# EAGLE board picoclick_c3t (EAGLE 9.6.2)
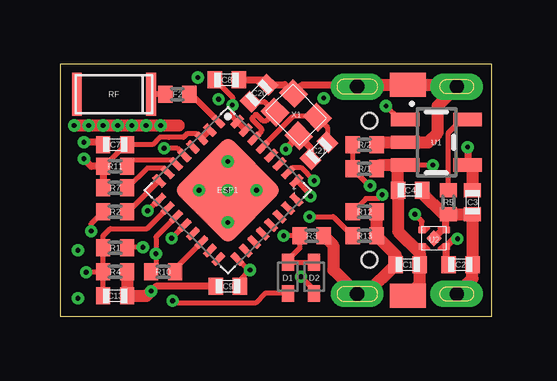
[diagram p0: board, top side]
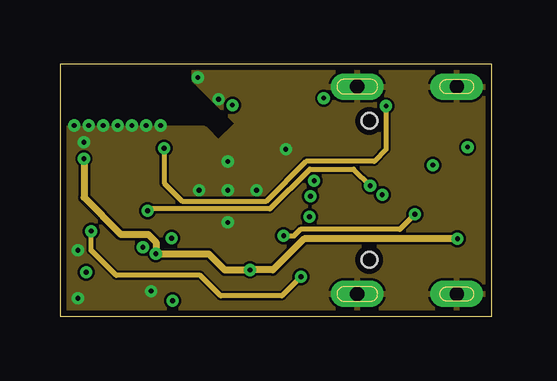
[diagram p1: board, inner layer Route2]
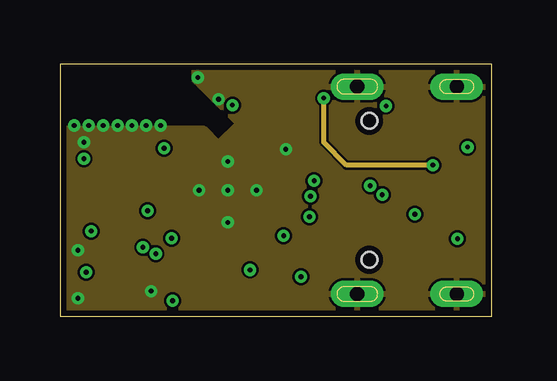
[diagram p2: board, inner layer Route15]
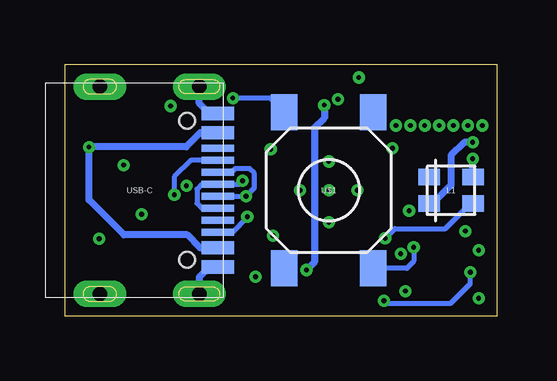
[diagram p3: board, bottom side, seen from below]

Size 18 x 10.5 mm. Coordinates in mm from the lower left corner, seen from the top.
Outline: 0,10.5 0,0 18,0 18,10.5 0,10.5
Copper layers (1+2*15+16): Top 0.035mm / dielectric 0.2mm / Route2 0.0175mm / dielectric 0.265mm / Route15 0.0175mm / dielectric 0.2mm / Bottom 0.035mm
Design rules "2020.08.24_4layers_eagle *": minimum track width 6mil, minimum drill 0.2mm, track to track 0.1mm, track to pad 0.1mm, pad to pad 0.1mm, via to via 0.1mm, smd to smd 0.1mm, copper to edge 10mil, drill to drill 6mil, minimum pad ring 10mil, minimum via ring 6mil, stop-mask expansion 0mil, vias tented up to drill 0.5mm, thermal gap 4mil

## Footprints (pad centres in the part's own frame; a part is rotated, then mirrored left to right if it is on the bottom)
SOLDERPAD_1.5X1.0 = smd 1 x 1.5: 1 0,0
C0402_S = smd 0.6 x 0.7: P$1 -0.5,0; P$2 0.5,0
SOD523 = smd 0.7 x 0.5: A 0.7,0; C -0.6,0
QFN32 = smd 0.6 x 0.275: 1 -2.3,1.75; 2 -2.3,1.25; 3 -2.3,0.75; 4 -2.3,0.25; 5 -2.3,-0.25; 6 -2.3,-0.75; 7 -2.3,-1.25; 8 -2.3,-1.75; 17 2.3,-1.75; 18 2.3,-1.25; 19 2.3,-0.75; 20 2.3,-0.25; 21 2.3,0.25; 22 2.3,0.75; 23 2.3,1.25; 24 2.3,1.75 | smd 0.275 x 0.6: 9 -1.75,-2.3; 10 -1.25,-2.3; 11 -0.75,-2.3; 12 -0.25,-2.3; 13 0.25,-2.3; 14 0.75,-2.3; 15 1.25,-2.3; 16 1.75,-2.3; 25 1.75,2.3; 26 1.25,2.3; 27 0.75,2.3; 28 0.25,2.3; 29 -0.25,2.3; 30 -0.75,2.3; 31 -1.25,2.3; 32 -1.75,2.3 | smd 3.2 x 3.2: EXP 0,0
R0402 = smd 0.6 x 0.7: 1 -0.5,0; 2 0.5,0
WS2812_2020 = smd 0.9 x 0.7: DI -0.915,0.55; DO 0.915,-0.55; GND 0.915,0.55; VDD -0.915,-0.55
ANT3216LL00R2400A = smd 1.8 x 0.4: P1 0,1.55; P2 0,-1.55
SOT23-5 = smd 0.55 x 1.2: 1 -0.95,-1.3; 2 0,-1.3; 3 0.95,-1.3; 4 0.95,1.3; 5 -0.95,1.3
TDFN4 = smd 0.48 x 0.48 rotated 45: EXP 0,0 | smd 0.25 x 0.3: P1 -0.35,-0.5; P2 0.35,-0.5; P3 0.35,0.5; P4 -0.35,0.5
BUTTON_ST-1187-3 = smd 1.5 x 1.1: P1 -3.25,1.85; P2 3.25,1.85; P3 -3.25,-1.85; P4 3.25,-1.85
USBC_C393939 = smd 0.55 x 1.35: A1B12 -3.2,0.775; A4B9 -2.4,0.775; B1A12 3.2,0.775; B4A9 2.4,0.775 | smd 0.275 x 1.35: A5 -1.25,0.775; A6 -0.25,0.775; A7 0.25,0.775; B5 1.75,0.775; B6 0.75,0.775; B7 -0.75,0.775; B8 1.25,0.775 | smd 0.3 x 1.35: A8 -1.75,0.775 | drill 0.6 pad 1 long: S1 -4.32,0; S2 4.32,0; S3 -4.32,-4.15; S4 4.32,-4.15 | hole 0.65: 2.89,-0.5; -2.89,-0.5
XTYL_2016 = smd 0.9 x 0.8: P1 -0.7,-0.55; P2 0.7,-0.55; P3 0.7,0.55; P4 -0.7,0.55

## Placement (x,y rotation side)
BAT+  TP/SP-1.5X1.0  [SOLDERPAD_1.5X1.0]  14.5,0.85 90 top
BAT-  TP/SP-1.5X1.0  [SOLDERPAD_1.5X1.0]  14.5,9.65 90 top
C1  1µ  [C0402_S]  14.5,2.15 0 top
C2  1µ  [C0402_S]  16.7,2.15 180 top
C3  1µ  [C0402_S]  17.2,4.75 90 top
C4  1µ  [C0402_S]  14.6,5.25 180 top
C7  10µ  [C0402_S]  2.3,7.15 0 top
C8  0,1µ  [C0402_S]  6.95,9.85 180 top
C9  0,1µ  [C0402_S]  7,1.25 0 top
C13  1µ  [C0402_S]  2.3,0.85 180 top
C20  10p  [C0402_S]  8.3,9.3 225 top
C21  10p  [C0402_S]  10.8,6.9 45 top
D1  4148  [SOD523]  9.5,1.65 270 top
D2  4148  [SOD523]  10.6,1.65 270 top
ESP1  ESP32_C3_QFN32  [QFN32]  7,5.25 315 top
F2  0  [R0402]  4.9,9.25 180 top
L1  WS2812_2020  [WS2812_2020]  1.9,5.25 180 bottom
R1  1k  [R0402]  2.3,2.85 0 top
R2  1k  [R0402]  2.3,4.35 0 top
R3  1M  [R0402]  10.5,3.35 180 top
R4  10k  [R0402]  2.3,1.85 180 top
R5  47.5k  [R0402]  16.2,4.75 270 top
R7  10k  [R0402]  2.3,5.35 0 top
R10  10k  [R0402]  4.3,1.85 0 top
R11  10k  [R0402]  2.3,6.25 0 top
R12  5.1k  [R0402]  12.7,4.35 0 top
R13  5.1k  [R0402]  12.7,3.35 0 top
R/1  1M  [R0402]  12.7,6.15 180 top
R/2  250k  [R0402]  12.7,7.15 0 top
RF  ANT3216LL00R2400A  [ANT3216LL00R2400A]  2.25,9.25 270 top
U1  BRCL4054BME  [SOT23-5]  15.7,7.25 270 top
U2  MIC5504  [TDFN4]  15.6,3.25 90 top
U$1  BUTTON_ST-1187-3  [BUTTON_ST-1187-3]  7,5.25 90 bottom
USB-C  USB_C_C393939  [USBC_C393939]  12.4,5.25 270 bottom
X1  XTAL_2016  [XTYL_2016]  9.85,8.4 315 top

## Library data of the parts
BAT+ BAT- = iml_elc
C1-C4 C7-C9 C13 C20 C21 ESP1 F2 L1 R1-R5 R7 R10-R13 R/1 R/2 RF U1 U2 U$1 USB-C X1 = moekoe
D1 D2 = diode

## Nets
+3V3: C2.P$2 C7.P$2 C8.P$2 C9.P$2 ESP1.2 ESP1.3 ESP1.11 ESP1.17 ESP1.31 ESP1.32 L1.VDD R7.1 R10.1 R11.1 U2.P1
+VBAT: BAT+.1 C1.P$2 C4.P$2 R/1.1 U1.3 U2.P4 U$1.P2
ADC: ESP1.9 R/1.2 R/2.1
BUTTON: C13.P$2 D1.A ESP1.10 R1.1 R4.2
DIN: ESP1.12 L1.DI
EN: ESP1.7 R7.2
EN_LDO: D1.C D2.C R3.2 U2.P3
GND: BAT-.1 C1.P$1 C2.P$1 C3.P$1 C4.P$1 C7.P$1 C8.P$1 C9.P$1 C13.P$1 C20.P$1 C21.P$1 ESP1.EXP L1.GND R3.1 R4.1 R5.2 R12.2 R13.2 R/2.2 U1.2 U2.EXP U2.P2 USB-C.A1B12 USB-C.B1A12 USB-C.S1 USB-C.S2 USB-C.S3 USB-C.S4 X1.P2 X1.P4
GPIO2: ESP1.6 R11.2
GPIO8: ESP1.14 R10.2
GPIO9: ESP1.15
GPIO10: ESP1.16
GPIO18: ESP1.25 USB-C.A7 USB-C.B7
GPIO19: ESP1.26 USB-C.A6 USB-C.B6
LATCH: ESP1.8 R2.2
N$1: R1.2 U$1.P3
N$4: ESP1.1 F2.1
N$6: F2.2 RF.P1
N$16: D2.A R2.1
N$18: R13.1 USB-C.B5
N$23: R5.1 U1.5
N$25: R12.1 USB-C.A5
N$26: C20.P$2 ESP1.30 X1.P1
N$27: C21.P$2 ESP1.29 X1.P3
RX: ESP1.27
STAT_MCP: ESP1.5 U1.1
TX: ESP1.28
VPP: C3.P$2 U1.4 USB-C.A4B9 USB-C.B4A9

## Tracks (layer width: path | path; a pad name or v marks a point on that pad's centre or on a via)
+3V3  (via drill 0.2)
  Top 0.2: R10.1 4,2.05 v4,2.6 4,3.31 ESP1.11 | C9.P$2 7.5,1.5 v7.93,1.93 7.85,1.93 ESP1.17 | ESP1.31 ESP1.32 7.19,8.31 v7.19,8.8 7.19,9.13 6.47,9.85 C8.P$2 | ESP1.2 ESP1.3 5.71,7.6 5.3,7.6 5.15,7.45 4.54,7.45 4.16,7.45 3.86,7.15 C7.P$2 2.74,7.15 1.84,6.25 R11.1
  Top 0.3: R7.1 R11.1 1.31,6.25 v1,6.56 | C2.P$2 16.1,2.25 U2.P1 16.43,3.23 v16.58,3.23
  Route2 0.3: v1,6.56 1,4.95 2.55,3.4 3.69,3.4 4,3.09 v4,2.6 6.2,2.6 6.87,1.93 v7.93,1.93 8.88,1.93 10.18,3.23 v16.58,3.23
  Bottom 0.3: L1.VDD 0.99,6.54 v1,6.56 | v7.19,8.8 7.19,8.26 7.6,7.85 7.6,2.26 v7.93,1.93
+VBAT  (via drill 0.2)
  Top 0.2: v15.55,6.3 U1.3
  Top 0.3: U2.P4 15.1,2.25 C1.P$2
  Top 0.5: BAT+.1 15,1.35 C1.P$2 15,2.65 14.1,3.55 C4.P$2 14.1,6.2 14,6.3 | 14,6.3 13.35,6.3 R/1.1 | U1.3 14,6.3
  Route15 0.2: v15.55,6.3 11.95,6.3 11,7.25 v11,9.09
  Bottom 0.2: U$1.P2 9.44,9.09 v11,9.09
ADC  (via drill 0.2)
  Top 0.2: R/2.1 R/1.2 12.91,5.44 v12.94,5.44 | ESP1.9 4.11,4.86 v3.65,4.4
  Route2 0.2: v3.65,4.4 3.72,4.47 8.76,4.47 10.42,6.13 12.25,6.13 v12.94,5.44
BUTTON  (via drill 0.2)
  Top 0.2: C13.P$2 R4.2 | R4.2 R1.1 1.8,3.35 2.1,3.65 3.63,3.65 ESP1.10 | R4.2 v1.1,1.84 | D1.A 8.55,0.95 8.15,0.55 4.8,0.55 v4.7,0.65
  Bottom 0.2: v4.7,0.65 4.6,0.55 1.9,0.55 1.1,1.35 v1.1,1.84
DIN  (via drill 0.2)
  Top 0.2: ESP1.12 v4.65,3.25
  Bottom 0.2: L1.DI 1.08,4.7 2.13,3.65 4.25,3.65 v4.65,3.25
EN
  Top 0.2: R7.2 2.83,5.35 3.65,6.17 4.31,6.17 ESP1.7
EN_LDO  (via drill 0.2)
  Top 0.2: D2.C D1.C 9.5,2.35 10,2.85 R3.2 v9.33,3.35 | U2.P3 15.1,3.95 v14.8,4.25
  Route2 0.2: v9.33,3.35 9.77,3.35 10.04,3.62 14.17,3.62 v14.8,4.25
GND  (via drill 0.2, 0.2 pad 0.5)
  Top 0.3: C21.P$1 10.45,7.03 X1.P2 9.42,6.98 v9.42,6.96 | USB-C.S1 12.35,9.62 10.08,9.62 X1.P4 9.37,9.65 C20.P$1 8.46,9.85 C8.P$1 | U2.EXP 15.95,3.6 U2.P2 16.1,4.15 R5.2 | C9.P$1 4,1.25 v3.8,1.05 | C7.P$1 1.7,7.25 v1,7.25
  Top 0.5: R12.2 R13.2 14,2.55 C1.P$1 12.78,0.93 USB-C.S2 11.4,1.93 11.4,2.95 R3.1 | R/2.2 13.3,7.25 U1.2 15.35,7.25 15.75,7.65 15.75,8.77 USB-C.S3 16.47,9.65 BAT-.1 12.48,9.65 USB-C.S1 | USB-C.S4 17.2,1.58 C2.P$1 C3.P$1 R5.2 16,4.25 15.1,5.15 C4.P$1 | R4.1 C13.P$1 3.6,0.85 v3.8,1.05 | v0.6,7.95 v1.2,7.95 v1.8,7.95 v2.4,7.95 v3,7.95 v3.6,7.95 v4.2,7.95 4.95,7.95
  Bottom 0.3: USB-C.S1 12.4,8.87 11.98,8.45 USB-C.A1B12 | USB-C.B1A12 11.98,2.05 12.4,1.63 USB-C.S2 | L1.GND 2.65,4.7 1.9,5.45 1.9,6.7 1.35,7.25 v1,7.25
  other vias: 6.62,9.04 5.75,9.95 7,5.25 5.8,5.25 8.2,5.25 7,6.45 7,3.91 0.75,2.75 0.75,0.75
  pour Route2: 0.25,7.85 6,7.85 6.6,7.25 7.4,8.05 5.6,9.85 5.6,10.25 17.75,10.25 17.75,0.25 0.25,0.25
  pour Route15: 0.25,7.85 6,7.85 6.6,7.25 7.4,8.05 5.6,9.85 5.6,10.25 17.75,10.25 17.75,0.25 0.25,0.25
GPIO2
  Top 0.2: ESP1.6 4.68,6.51 3.06,6.51 R11.2
GPIO8
  Top 0.2: ESP1.14 4.8,1.99 R10.2
GPIO18  (via drill 0.2)
  Top 0.2: ESP1.25 10.45,5.05 v10.45,5
  Bottom 0.2: USB-C.A7 v10.45,5 10.1,5.35 10.1,5.95 10.3,6.15 10.9,6.15 11.05,6 USB-C.B7
GPIO19  (via drill 0.2)
  Top 0.2: ESP1.26 9.72,6.2 10.05,6.2 v10.6,5.65
  Bottom 0.2: v10.6,5.65 10.75,5.5 USB-C.A6 12.3,5.5 12.5,5.3 12.5,4.7 12.3,4.5 USB-C.B6
LATCH
  Top 0.2: ESP1.8 2.85,4.35 R2.2
N$1  (via drill 0.2)
  Top 0.2: v3.46,2.88 2.83,2.88 R1.2
  Bottom 0.2: v3.46,2.88 3.46,2.29 3.75,2 U$1.P3
N$4
  Top 0.25: ESP1.1 5.47,9.25 F2.1
N$6
  Top 0.25: F2.2 RF.P1
N$16  (via drill 0.2)
  Top 0.2: D2.A 10.6,1.1 v10.05,1.65 | R2.1 1.3,3.85 v1.3,3.55
  Route2 0.2: v10.05,1.65 9.25,0.85 6.7,0.85 5.85,1.7 2.35,1.7 1.3,2.75 v1.3,3.55
N$18  (via drill 0.2)
  Top 0.2: v10.4,4.15 11.4,4.15 R13.1
  Bottom 0.2: USB-C.B5 11,3.5 10.4,4.1 v10.4,4.15
N$23
  Top 0.2: U1.5 16.75,8.2 16.2,7.65 R5.1
N$25  (via drill 0.2)
  Top 0.2: R12.1 12.75,4.9 13.28,4.9 v13.44,5.06
  Bottom 0.2: USB-C.A5 12.75,6.5 13.44,5.81 v13.44,5.06
N$26
  Top 0.2: C20.P$2 8.53,8.95 X1.P1 8.61,8.15 8.45,8.15 8.2,8.4 8.15,8.4 8.02,8.27 8.02,8.2 8.4,7.82 8.4,7.71 ESP1.30
N$27
  Top 0.2: C21.P$2 11.15,7.87 X1.P3 10.7,8.32 9.72,8.32 ESP1.29
STAT_MCP  (via drill 0.2, 0.2 pad 0.5)
  Top 0.2: ESP1.5 4.9,7 v4.35,7 | U1.1 14.16,8.2 v13.6,8.76
  Route2 0.2: v4.35,7 4.35,5.55 5.1,4.8 8.61,4.8 10.27,6.46 13.11,6.46 13.6,6.95 v13.6,8.76
VPP  (via drill 0.2)
  Top 0.3: v17,7.05 | v17,7.05 U1.4
  Top 0.5: U1.4 17.2,6.3 C3.P$2
  Bottom 0.3: USB-C.A4B9 12.36,7.65 12.95,7.06 v16.99,7.06 v17,7.05 17,4.85 15.54,3.39 12.9,3.39 12.36,2.85 USB-C.B4A9

## Text on the board
tPlace: -+
bSilkNew: Picoclick v3 / @maker.moekoe / 14.11.2021